# Altium PCB ServoBoard.PcbDoc
Units mil, origin at the board's own origin, x right, y up, seen from the top; angles counter-clockwise.
Board outline 1294.55 x 1041.99 mil, 2 copper layers (Top Layer, Bottom Layer); 32 components, 25 nets, 158 pads, 33 vias.
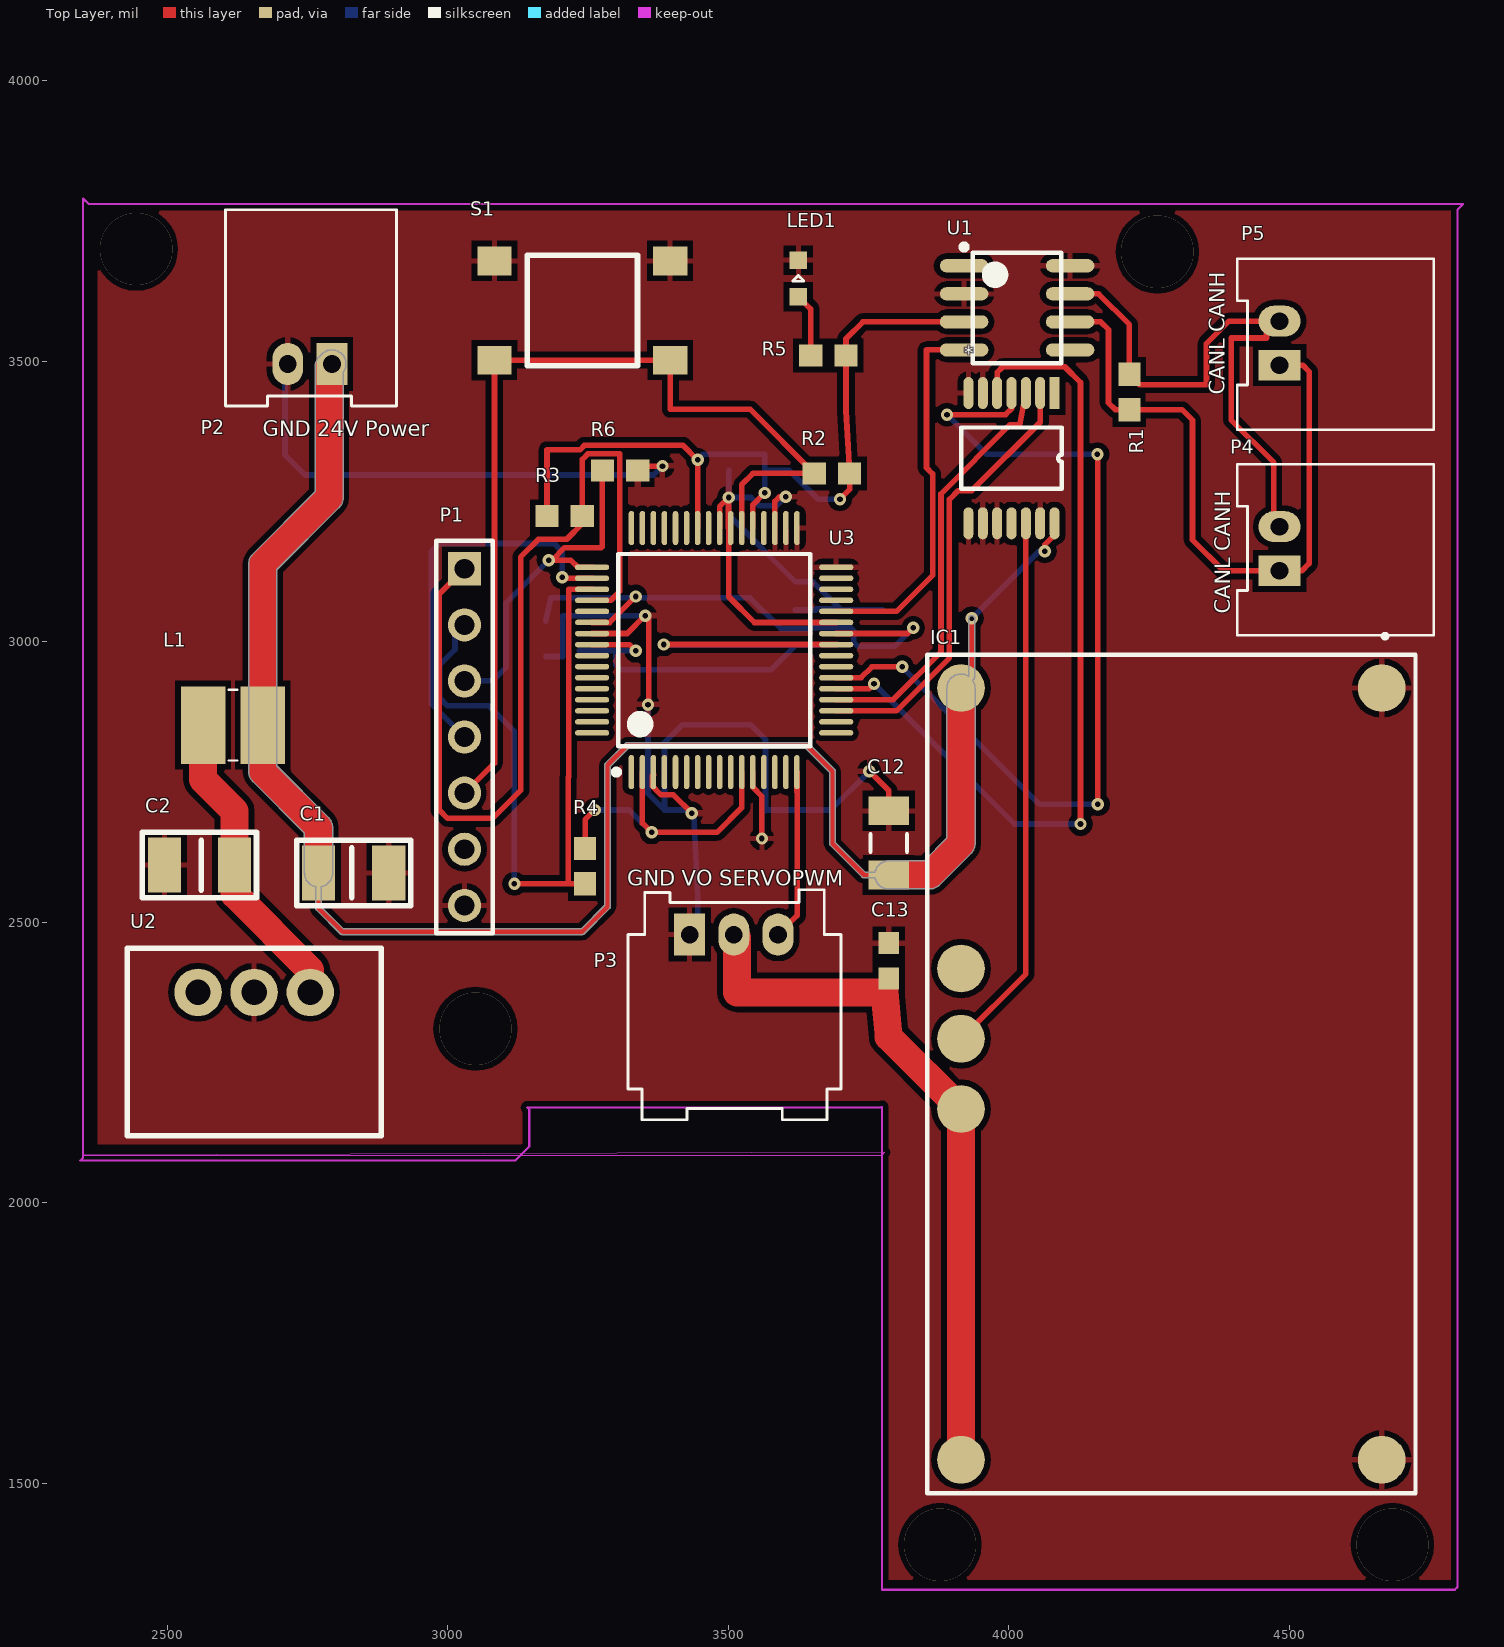
[diagram p0: Top Layer view]
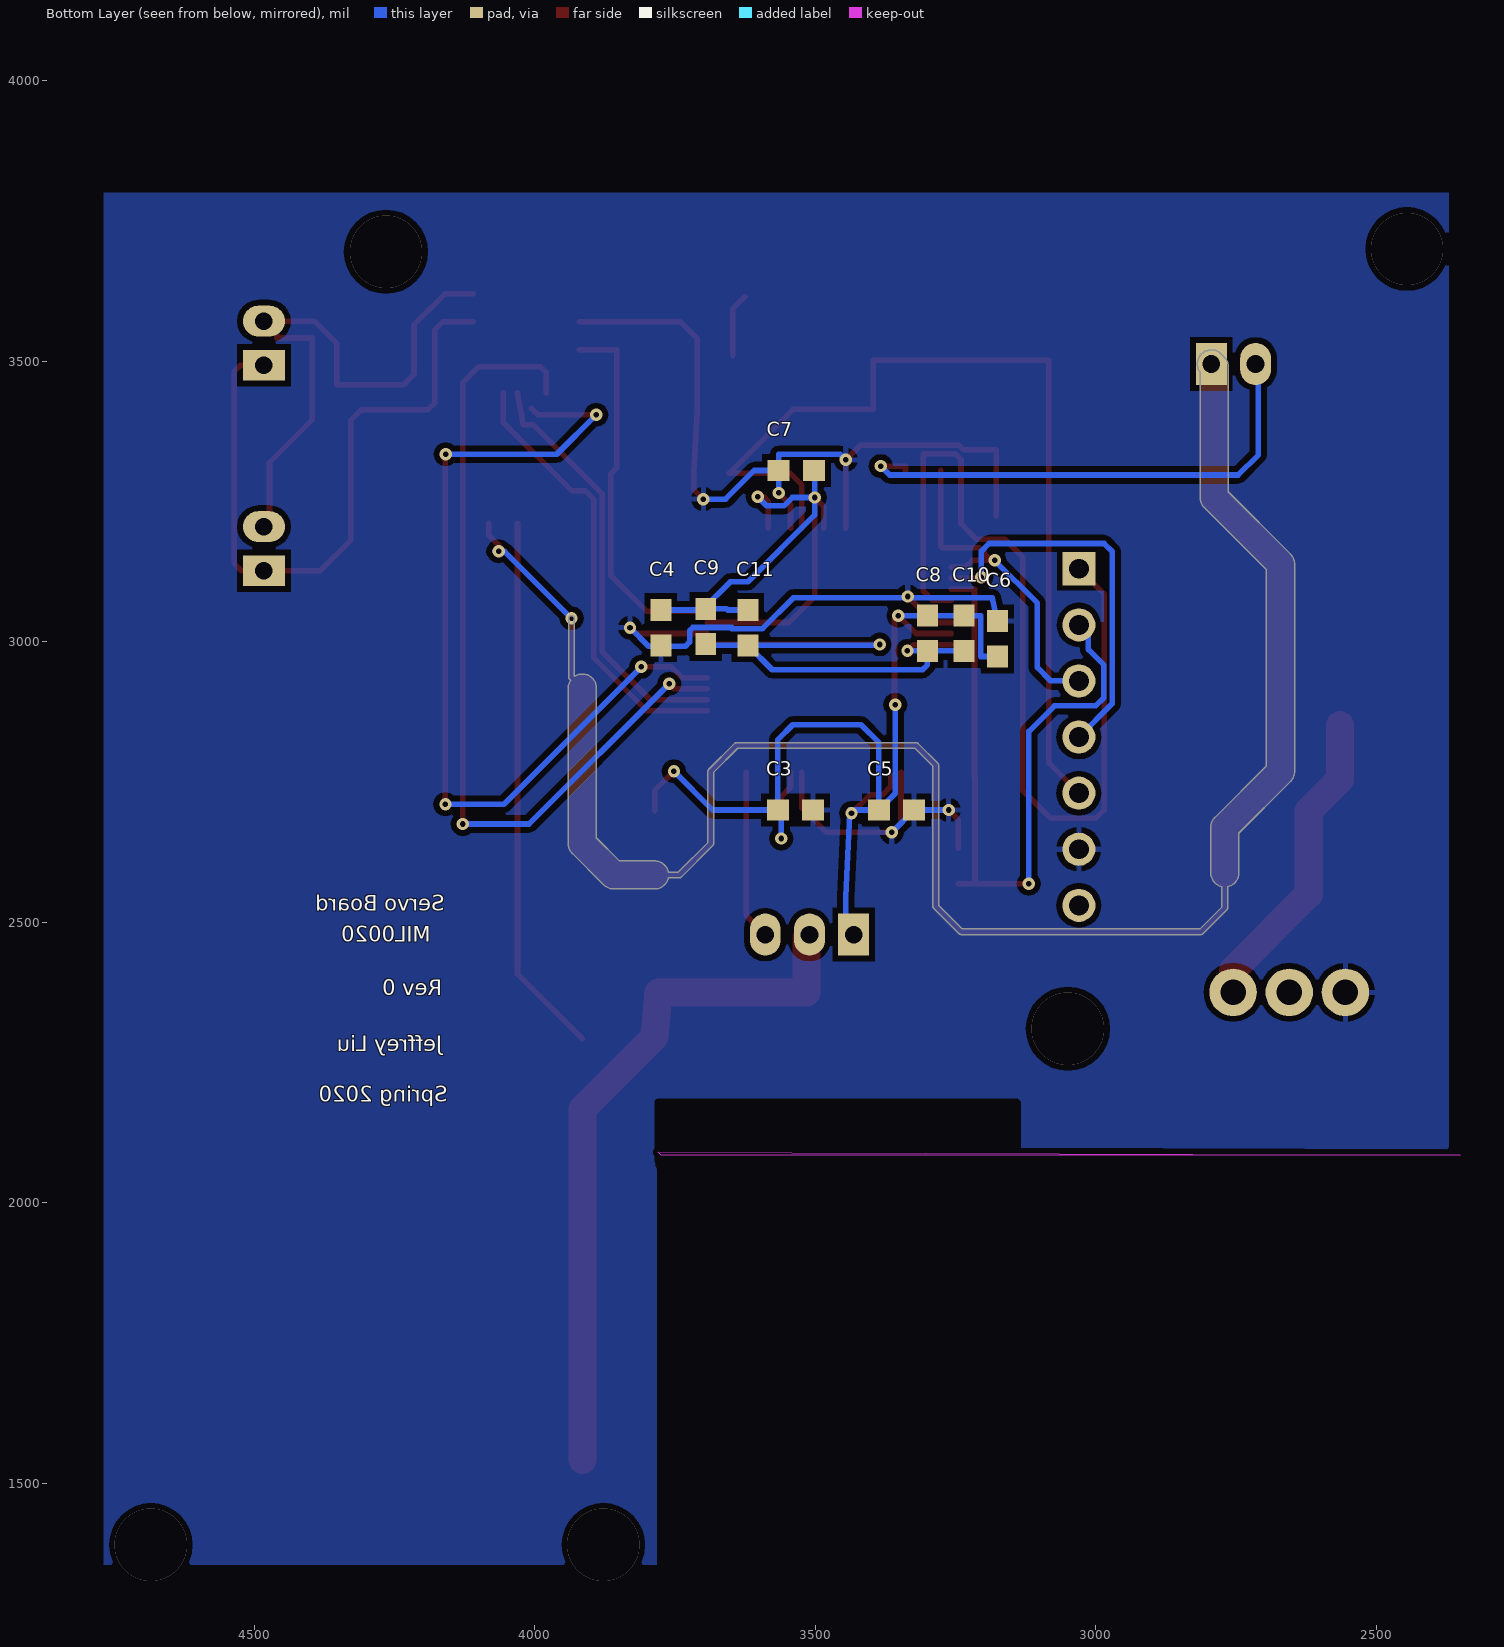
[diagram p1: Bottom Layer view, seen from below]

## Layer stack, top to bottom
Top Solder: solder mask 0.4, Solder Resist, Dk 3.5
Top Layer: signal copper 1.4
Dielectric 1: dielectric 12.6, FR-4, Dk 4.8
Bottom Layer: signal copper 1.4
Bottom Solder: solder mask 0.4, Solder Resist, Dk 3.5

## Board outline
2766.27,2521.63 cw(c2769.8,2525.2) 2764.79,2525.2 2764.79,2563.25 cw(c2769.8,2587.76) 2744.79,2587.76 2744.79,2658.64 2652.8,2750.63 cw(c2670.48,2768.32) 2645.47,2768.32 2645.47,3138.48 cw(c2670.48,3138.48) 2652.8,3156.17 2763.72,3267.1 2763.72,3490 cw(c2788.74,3490) 2771.05,3507.69 2776.05,3512.69 cw(c2793.74,3495) 2818.76,3495 cw(c2793.74,3495) 2813.76,3479.99 2813.76,3256.74 cw(c2788.74,3256.74) 2806.43,3239.05 2695.5,3128.12 2695.5,2778.68 2787.49,2686.69 cw(c2769.8,2669) 2794.82,2669 2794.82,2587.76 cw(c2769.8,2587.76) 2774.82,2563.25 2774.82,2527.27 2814.08,2488.01 3237.92,2488.01 3279.99,2530.08 3279.99,2780 cw(c3285,2780) 3281.47,2783.56 3281.45,2783.55 3316.45,2818.55 3316.44,2818.53 cw(c3320,2815) 3320,2820.01 3640,2820.01 cw(c3640,2815) 3643.56,2818.53 3643.55,2818.55 3689.55,2772.55 3689.53,2772.56 cw(c3686,2769) 3691.01,2769 3691.01,2642.08 3743.89,2589.21 3761.68,2589.21 cw(c3786.19,2584.19) 3786.19,2609.21 3848.83,2609.21 3889.99,2650.36 3889.99,2917.33 cw(c3915,2917.33) 3928.78,2938.21 3929.14,2938.56 3929.14,3041.5 cw(c3934.15,3041.5) 3939.16,3041.5 3939.16,2936.48 cw(c3934.15,2936.48) 3937.68,2932.92 3937.7,2932.94 3935.88,2931.12 cw(c3915,2917.33) 3940.01,2917.33 3940.01,2640 cw(c3915,2640) 3932.69,2622.31 3876.88,2566.5 cw(c3859.19,2584.19) 3859.19,2559.18 3786.19,2559.18 cw(c3786.19,2584.19) 3761.68,2579.18 3741.81,2579.18 cw(c3741.81,2584.19) 3738.24,2580.66 3738.26,2580.65 3682.45,2636.45 3682.47,2636.44 cw(c3686,2640) 3680.99,2640 3680.99,2766.92 3637.92,2809.99 3322.08,2809.99 3290.01,2777.92 3290.01,2528 cw(c3285,2528) 3288.53,2524.44 3288.55,2524.45 3243.55,2479.45 3243.56,2479.47 cw(c3240,2483) 3240,2477.99 2812,2477.99 cw(c2812,2483) 2808.44,2479.47 2808.45,2479.45
cut-out: 2350,2085 3774.23,2085 3779.23,2090

## Design rules (kind name [scope] priority, off if disabled: settings)
Clearance [All] p1: gap=10 ignorepadtopadclearanceinfootprint=FALSE except(0: Arc-Hole Track-Hole SMDPad-Hole THPad-Hole Via-Hole Fill-Hole Poly-Hole Region-Hole Text-Hole; 5: Track-Track Track-SMDPad SMDPad-SMDPad; 7: Track-Via)
HoleSize [All] p1: absolutevalues=TRUE maxlimit=150 minlimit=10 maxpercent=80.000 minpercent=20.000
MinimumAnnularRing [All] p1: minimumring=7
MinimumSolderMaskSliver [All] p1: minsoldermaskwidth=1
PolygonConnect [All] p1: connectstyle=Relief reliefconductorwidth=10 reliefentries=4 polygonreliefangle="90 Angle" airgapwidth=10
RoutingVias [All] p1: holewidth=10 width=22 viastyle="Through Hole" minholewidth=10 minwidth=22 maxholewidth=100 maxwidth=150
SilkToSolderMaskClearance [IsPad] p1: minsilkscreentomaskgap=5 clearancetoexposedcopper=TRUE
SolderMaskExpansion [All] p1: expansion=4
Width [All] p1: maxlimit=150 minlimit=8 preferedwidth=10
27 further rules are at their usual default settings.

## Classes and differential pairs
component class ServoBoard: "24V Gnd Power" * C3 C4 C5 C6 C7 C8 C9 C10 C11 C12 C13 C? IC1 LED1 P1 P2 P3 R2 R3 R4 R5 R6 S1 "Servo PWM Power" U3 U?
component class RECOM_24to3v3: C1 C2 L1 U2
component class CAN_Connections: "CANH/CANL Power" R1 U1

## Components (designator, comment, footprint, x,y, rotation, side; value= is the part's Value field where it differs from the comment)
* "MCP41HV31" "MCP41HV31 - duplicate2" 4081.77,3443.19 r270 top
C1 "CAP1210" CAP1210 2769.02,2587.76 r180 top value=10uF
C2 "CAP1210" CAP1210 2620.98,2601.81 r0 top value=10uF
C3 "Cap" CAPC0603 3535,2700 r0 bottom value=0.1uF
C4 "Cap" CAPC0603 3775,3025 r90 bottom value=0.1uF
C5 "Cap" CAPC0603 3355,2700 r0 bottom value=0.1uF
C6 "Cap" CAPC0603 3175,3005 r270 bottom value=0.1uF
C7 "Cap" CAPC0603 3533.5,3305 r180 bottom value=2.0uF
C8 "Cap" CAPC0603 3300,3015 r90 bottom value=0.1uF
C9 "Cap" CAPC0603 3695,3027.09 r90 bottom value=0.1uF
C10 "Cap" CAPC0603 3235,3015 r90 bottom value=1.0uF
C11 "Cap" CAPC0603 3620,3025 r90 bottom value=2.2uF
C12 "Cap" CAPC1206 3786.19,2641.28 r90 top value=2.2uF
C13 "Cap" CAPC0603 3786.19,2431.04 r90 top value=330uF
IC1 "PTN78020WAH" EUL(R-PDSS-B7) 4290,2229.54 r270 top
L1 "RLS-567" RLS567 2617.34,2851.23 r180 top
LED1 "LED" LED0603 3625,3647.48 r90 top
P1 "Header 7" HDR1X7 3030,3130 r270 top
P2 "2-pin Horz Sherlock" MOLEX-HDR-1X2-SHERLOCK-HORZ 2793.74,3495 r0 top
P3 "3pos RA sherlock connector" MOLEX-HDR-1X3-SHERLOCK-RA 3431.34,2477.79 r180 top
P4 "2-pin Horz Sherlock" MOLEX-HDR-1X2-SHERLOCK-HORZ 4482.54,3126.35 r270 top
P5 "2-pin Horz Sherlock" MOLEX-HDR-1X2-SHERLOCK-HORZ 4482.54,3492.61 r270 top
R1 "Res" RES0603 4215,3445 r90 top value=120
R2 "Res" RES0603 3685,3300 r180 top value=10k
R3 "Res" RES0603 3208.5,3223.74 r0 top value=10k
R4 "Res" RES0603 3245,2600 r270 top value=10k
R5 "Res" RES0603 3678.5,3510 r180 top value=1k
R6 "Res" RES0603 3307.36,3305 r0 top value=10k
S1 "Button" PTS645xxxxSMTR92 3240,3590 r180 top
U1 "SN65HVD230DR" SOIC-8pin 4015,3595 r0 top
U2 "R-78C3.3-1.0" R-78C3.3-1.0 2755,2375 r180 top
U3 "TM4C123GH6PMT7R" TM4C123GH6PMT7R_L 3475,2985 r90 top value=Value

## Footprints (in the part's own frame and the unit in brackets; to place one, negate y for a bottom-side part, rotate by r counter-clockwise, add the part's x,y. Pads: shape width x height; smd on the part's side, far side on the other; paste and mask are expansions set on the pad)
CAP1210 [mm]
  rect 1.5x2.5 smd: 1(-0.02,0) 2(-3.2,0)
  silkscreen extent -4.2,-1.48 0.97,1.48, body extent -3.22,-1.25 0,1.26, height 2.5
CAPC0603 [mm] "Chip Capacitor, 2-Leads, Body 1.60x0.80mm, IPC Medium Density"
  rect 1x0.95 smd: 1(-0.8,0) 2(0.8,0)
  body extent -0.88,-0.48 0.87,0.48, height 0.8
CAPC1206 [mm] "Chip Capacitor, 2-Leads, Body 3.20x1.60mm, IPC Medium Density"
  rect 1.3x1.85 smd: 1(-1.45,0) 2(1.45,0)
  silkscreen extent -0.4,-0.83 0.4,0.83, body extent -1.7,-0.9 1.7,0.9, height 1.8
EUL(R-PDSS-B7) [mm]
  round 2.16 smd: 1(-17.47,9.525) 2(-17.47,-9.525) 3(-4.77,-9.525) 4(-1.59,-9.525) 5(1.59,-9.525) 6(17.47,-9.525) 7(17.47,9.525)
  silkscreen extent -19.91,-11.05 18.99,11.05
HDR1X7 [mm] "Connector; Header; 7 Position"
  rect 1.5x1.5 hole 0.9: 1(0,0)
  round 1.5 hole 0.9: 2(2.54,0) 3(5.08,0) 4(7.62,0) 5(10.16,0) 6(12.7,0) 7(15.24,0)
  silkscreen extent -1.27,-1.27 16.51,1.27
LED0603 [mm] "Chip LED, 2-Leads, Body 1.60x0.80mm, IPC Medium Density"
  rect 0.8x0.8 smd: A(-0.825,0) C(0.825,0)
  silkscreen extent -0.12,-0.25 0.13,0.25, body extent -0.88,-0.48 0.87,0.47, height 0.8
"MCP41HV31 - duplicate2" [mm]
  rect 1.45x0.45 smd: 1(0,0)
  oval 1.45x0.45 smd: 2(0,-0.65) 3(0,-1.3) 4(0,-1.95) 5(0,-2.6) 6(0,-3.25) 7(0,-3.9) 8(5.9,-3.9) 9(5.9,-3.25) 10(5.9,-2.6) 11(5.9,-1.95) 12(5.9,-1.3) 13(5.9,-0.65) 14(5.9,0)
  silkscreen extent 1.56,-4.23 4.34,0.33
MOLEX-HDR-1X2-SHERLOCK-HORZ [mm]
  rect 1.397x1.905 hole 0.8: 1(0,0)
  oval 1.397x1.905 hole 0.8: 2(-2,0)
  silkscreen extent -4.83,-1.91 2.92,6.98, body extent -4.83,-1.91 2.87,8.59, height 5.54
MOLEX-HDR-1X3-SHERLOCK-RA [mm]
  rect 1.397x1.905 hole 0.8: 1(0,0)
  oval 1.397x1.905 hole 0.8: 2(-2,0) 3(-4,0)
  silkscreen extent -6.86,-2.03 2.79,8.38, body extent -6.88,-1.99 2.82,8.51, height 5.75
PTS645xxxxSMTR92 [mm] "PTS645 Series SMT 6 mm Tactile Switch"
  rect 1.555x1.3 smd: A(-3.975,2.25) A(3.975,2.25) B(-3.975,-2.25) B(3.975,-2.25)
  silkscreen extent -2.5,-2.5 2.5,2.5, body extent -3,-3 3,3, height 4.5
R-78C3.3-1.0 [mm] "CONV DC/DC 1A 3.3V OUT SIP VERT"
  round 2.15 hole 1.15: 1(0,0) 2(2.54,0) 3(5.08,0)
  silkscreen extent -3.21,-2 8.29,6.5, body extent -3.3,-2.03 8.38,6.6, height 10.4
RES0603 [mm] "Chip Resistor, 2-Leads, Body 1.60x0.80mm, IPC Medium Density"
  rect 1.05x1 smd: 1(-0.8,0) 2(0.8,0)
  body extent -0.88,-0.48 0.87,0.47, height 0.8
RLS567 [mm]
  rect 2x3.5 smd: 1(-1.35,0) 2(1.35,0)
  silkscreen extent -0.2,-1.6 0.2,1.6, body extent -2.54,-1.9 2.54,1.91, height 2.6
SOIC-8pin [mm] "For 296-1345-1-ND"
  oval 2.2x0.6 smd: 1(-2.4,1.905) 2(-2.4,0.635) 3(-2.4,-0.635) 4(-2.4,-1.905) 5(2.4,-1.905) 6(2.4,-0.635) 7(2.4,0.635) 8(2.4,1.905)
  silkscreen extent -2.52,-2.5 2,2.88, body extent -2,-2.5 2,2.5, height 1.75
TM4C123GH6PMT7R_L [mm]
  oval 1.55x0.25 smd paste-0.102 mask+0.051: 1(-5.525,3.75) 2(-5.525,3.25) 3(-5.525,2.75) 4(-5.525,2.25) 5(-5.525,1.75) 6(-5.525,1.25) 7(-5.525,0.75) 8(-5.525,0.25) 9(-5.525,-0.25) 10(-5.525,-0.75) 11(-5.525,-1.25) 12(-5.525,-1.75) 13(-5.525,-2.25) 14(-5.525,-2.75) 15(-5.525,-3.25) 16(-5.525,-3.75) 33(5.525,-3.75) 34(5.525,-3.25) 35(5.525,-2.75) 36(5.525,-2.25) 37(5.525,-1.75) 38(5.525,-1.25) 39(5.525,-0.75) 40(5.525,-0.25) 41(5.525,0.25) 42(5.525,0.75) 43(5.525,1.25) 44(5.525,1.75) 45(5.525,2.25) 46(5.525,2.75) 47(5.525,3.25) 48(5.525,3.75)
  oval 0.25x1.55 smd paste-0.102 mask+0.051: 17(-3.75,-5.525) 18(-3.25,-5.525) 19(-2.75,-5.525) 20(-2.25,-5.525) 21(-1.75,-5.525) 22(-1.25,-5.525) 23(-0.75,-5.525) 24(-0.25,-5.525) 25(0.25,-5.525) 26(0.75,-5.525) 27(1.25,-5.525) 28(1.75,-5.525) 29(2.25,-5.525) 30(2.75,-5.525) 31(3.25,-5.525) 32(3.75,-5.525) 49(3.75,5.525) 50(3.25,5.525) 51(2.75,5.525) 52(2.25,5.525) 53(1.75,5.525) 54(1.25,5.525) 55(0.75,5.525) 56(0.25,5.525) 57(-0.25,5.525) 58(-0.75,5.525) 59(-1.25,5.525) 60(-1.75,5.525) 61(-2.25,5.525) 62(-2.75,5.525) 63(-3.25,5.525) 64(-3.75,5.525)
  silkscreen extent -5.65,-4.35 4.35,4.55, body extent 0,0 0.25,0.25, height 0.25

## Part data
C1 C2: "CAP CER 10UF 50V 20% X5R 1210", Supplier Part Number 1=CGA6P1X7R1N106K250AC, Supplier 1=Digi-Key
C3 C4 C5 C6 C7 C8 C9 C10 C11 C12 C13: Supplier Part Number 1=1276-1000-1-ND, Supplier 1=Digi-Key
IC1: "Integrated Circuit", Manufacturer_Name="Texas Instruments", Mouser Part Number=595-PTN78020WAH, RS Part Number=5457849P, Datasheet Link=http://www.ti.com/lit/gpn/ptn78020w, Manufacturer_Part_Number=PTN78020WAH, Mouser Price/Stock=https://www.mouser.com/Search/Refine.aspx?Keyword=595-PTN78020WAH, RS Price/Stock=http://uk.rs-online.com/web/p/products/5457849P
L1: "Inductor", Manufacturer_Name="RECOM Power", Mouser Part Number=919-RLS-567, Datasheet Link=https://componentsearchengine.com/Datasheets/1/RLS-567.pdf, Height=3.1mm, Manufacturer_Part_Number=RLS-567, Mouser Price/Stock=https://www.mouser.com/Search/Refine.aspx?Keyword=919-RLS-567
LED1: Color=Green, Supplier Part Number 1=754-1122-1-ND, Supplier 1=Digi-Key
P1: "Header, 7-Pin", LatestRevisionDate=17-Jul-2002, LatestRevisionNote="Re-released for DXP Platform.", Publisher="Altium Limited"
P2 P4 P5: library part MOLEX-HDR-1x2-SHERLOCK_RA, "Header, Molex, 2mm Pitch Sherlock Header, Single Row, Horizontal, 2 Circuits, Length 3.3mm,  0353630260", Manufacturer="Molex Inc", Manufacturer Part Number=0353630260, Supplier Part Number 1=WM18931-ND, Supplier 1=Digi-Key
P3: library part MOLEX-HDR-1x3-SHERLOCK_RA, "Header, Molex, 2mm Pitch Sherlock Header, Single Row, Right Angle 3 Circuits, Length 3.3mm", Manufacturer="Molex Connector Corporation", Manufacturer Part Number=35363-0360, Supplier Part Number 1=WM18932-ND, Supplier 1=Digi-Key
R1 R2 R3 R4 R5 R6: Supplier Part Number 1=RMCF0603JT10K0CT-ND, Supplier 1=Digi-Key
S1: "SPST Button", Supplier Part Number 1=CKN9087CT-ND, Supplier 1=Digi-Key
U1: "IC TXRX CAN 1MBPS 3.3V 8SOIC", Supplier Part Numbe 1=296-11654-1-ND, Supplier 1=Digi-Key
U2: "CONV DC/DC 1A 3.3V OUT SIP VERT", Supplier Part Number 1=945-1394-5-ND, Supplier 1=Digi-Key
U3: "Imported", Alternate_PartNumber=TM4C123GH6PMT, Manufacturer="Texas Instruments", PartNumber=TM4C123GH6PMTR, CompType=IC, MountType=SMT, PackageReference=PM0064A, PIN_COUNT=64, RefDes=RefDes, RoHS=Y, TYPE=TYPE

## Via types
v1: diameter 22, hole 10, Top Layer to Bottom Layer, tented both sides, 28 vias
v2: diameter 129, hole 129, Top Layer to Bottom Layer, tented both sides, 5 vias

## Nets (pads, with @x,y where several pads share a name; then routed paths per layer and width w, separated by ;. In a path a pad name is that pad's centre, name@x,y a point inside that pad or via, vN(x,y) a via of type N, cw(c..) or ccw(c..) an arc to the next point about the centre after c; other vN are vias at no path point)
5V5: *.1
24V: *.14 C1.1 C12.1 IC1.2 L1.1 P2.1 | length 3356.8
  Top Layer w10: C1.1 2769.8,2525.2 2812,2483 3240,2483 3285,2528 3285,2780 3320,2815 3640,2815 3686,2769 3686,2640 3741.81,2584.19 C12.1 ; IC1.2 3934.15,2936.48 v1(3934.15,3041.5) ; v1(4064.15,3161.29) 4064.15,3172.53 4081.77,3190.15 *.14
  Top Layer w50: C1.1 2769.8,2669 2670.48,2768.32 L1.1 2670.48,3138.48 2788.74,3256.74 2788.74,3490 P2.1 ; C12.1 3859.19,2584.19 3915,2640 IC1.2
  Bottom Layer w10: v1(3934.15,3041.5) 4053.65,3161 v1@4071,3161
CAN0_RX: U1.4 U3.28 | length 671.7
  Top Layer w10: U3.28 3800,3053.9 3864.37,3118.27 3864.37,3299.15 3853.55,3309.96 3853.55,3520 U1.4
CAN0_TX: U3.31
CAN_TX: U1.1
CANH: P4.2 P5.2 R1.2 U1.7 | length 1062.4
  Top Layer w10: U1.7 4160,3620 4215,3565 R1.2 4233.65,3457.85 4352.54,3457.85 4352.54,3531.35 4392.54,3571.35 P5.2 4459.5,3548.31 4459.5,3541.35 4396.54,3541.35 4396.54,3395.35 4472.54,3319.35 4472.54,3205.09 P4.2
CANL: P4.1 P5.1 R1.1 U1.6 | length 1216.4
  Top Layer w10: U1.6 4164,3570 4177.8,3556.2 4177.8,3425.71 4190,3413.5 R1.1 4308.89,3413.5 4327.54,3394.86 4327.54,3181.35 4382.54,3126.35 P4.1 4522.54,3126.35 4535.54,3139.35 4535.54,3481.35 4524.28,3492.61 P5.1
GND: *.6 *.7 *.8 *.9 *.10 *.13 C1.2 C2.2 C3.2 C4.2 C5.2 C6.2 C7.2 C8.2 C9.2 C10.2 C11.2 C12.2 C13.2 IC1.1 IC1.7 LED1.C P1.7 P2.2 P3.1 R6.2 S1.B U1.2 U1.8 U2.2 U3.3 U3.12 U3.27 U3.32 U3.33 U3.34 U3.35 U3.39 U3.40 U3.55 | length 4080.6
  Top Layer w10: U3.55 3320.03,3014.53 v1(3352,3046.5) 3358.5,3039.99 3358.5,2889.17 v1(3357.12,2887.79) ; R6.2 3338.86,3313 v1(3383,3313) ; U3.3@3366.88,2762.86 3365,2760.98 3365,2742.21 3380.24,2726.97 3402.39,2726.97 v1(3435.21,2694.15) ; U3.40 3484.84,3240.84 v1@3500.53,3256.53 ; U3.39@3500.53,3202.52 v1@3500.53,3256.53 ; v1@3500.53,3260.47 v1@3500.53,3256.53 ; U3.39@3501,3202.52 3501,3080 3546.79,3034.21 U3.27 ; v1(3501,3257) v1@3500.53,3256.53 ; U3.12 3543.9,2740.47 3560.15,2724.22 v1(3560.15,2649.15) ; U3.35 3583.27,3250.03 3591.57,3258.34 v1(3602.45,3258.34) ; v1(3751.69,2769.02) 3786.19,2734.52 C12.2
  Bottom Layer w10: P2.2 2710,3490 2710,3333 2746,3297 3367,3297 v1(3383,3313) ; C6.2 3205,2973.5 3205,3046.5 C10.2 C8.2 v1(3352,3046.5) ; v1(3357.12,2887.79) 3357.12,2729.37 C5.2 ; P3.1 3445.47,2491.92 3445.47,2545 3438.28,2694.29 3438,2700 C5.2 ; 3501,3269 3501,3305 C7.2 ; v1(3560.15,2649.15) 3560.15,2693.65 C3.2 ; v1(3602.45,3258.34) 3586.22,3242.1 3555.47,3242.1 3540.58,3257 v1(3501,3257) 3501,3225.68 3620.06,3106.62 3651.38,3106.62 C9.2@3701.5,3056.5 ; C11.2 3656,3056.5 3658.09,3058.58 C9.2 C9.2@3701.5,3056.5 ; v1(3751.69,2769.02) 3682.67,2700 C3.2 ; C4.2 C9.2@3701.5,3056.5 ; C5.2 3386.5,2820.16 3418.33,2852 3540,2852 3566.5,2825.5 C3.2
Inhibit: IC1.3
Net*_12: *.12 IC1.4 | length 966.7
  Top Layer w10: IC1.4 4030.59,2407.73 *.12
NetC2_1: C2.1 L1.2 U2.1 | length 555.3
  Top Layer w50: L1.2 2564.19,2754.01 2620.2,2698 C2.1 2620.2,2549.8 2755,2415 U2.1
NetLED1_A: LED1.A R5.2 | length 114.1
  Top Layer w10: LED1.A 3647.01,3592.99 R5.2
RST_N: P1.5 R2.2 S1.A U3.38 | length 1713.3
  Top Layer w10: P1.5 3083.5,2783.5 3083.5,3501.42 3396.5,3501.42 3396.5,3414 3539.5,3414 R2.2 3544.21,3300 3524.21,3280 U3.38
ServoPWM: P3.3 U3.16 | length 338.6
  Top Layer w10: P3.3 3622.87,2511.84 U3.16@3622.87,2767.48 ; 3622.64,2732.69 U3.16
SPIChipSelect: *.3 U3.20 | length 753
  Top Layer w10: U3.20 3794,2896.42 3879.37,2981.79 3879.37,3263.52 4002.65,3386.8 4020,3386.8 *.3
SPICLK: *.2 U3.19 | length 794.2
  Top Layer w10: U3.19 3800,2876.73 3894.37,2971.1 3894.37,3253.52 3910,3269.15 3934.15,3269.15 4056.18,3391.18 *.2
SPIRx: *.5 U3.21 | length 1530.9
  Top Layer w10: U3.21 3751.1,2916.1 v1(3760,2925) ; *.5 3979.41,3480 3989.41,3490 4100,3490 4128,3462 v1(4128,2675)
  Bottom Layer w10: v1(3760,2925) 4010,2675 v1(4128,2675)
SPITx: *.4 U3.22 | length 1616.8
  Top Layer w10: U3.22 3737,2935.79 3756.21,2955 v1(3810,2955) ; v1(3890,3404.65) 3994.46,3404.65 *.4@4005.51,3415.7 ; v1(4159,2710) v1@4159,3333.42
  Bottom Layer w10: v1(3810,2955) 4055,2710 v1(4159,2710) ; v1(3890,3404.65) 3960.51,3334.15 v1(4158.15,3334.15)
TCK/SWCLK: P1.1 R3.2 U3.52 | length 1658.3
  Top Layer w10: P1.1 2985,3085 2985,2700 3000,2685 3080,2685 3130,2735 3130,3151 3161.63,3182.63 3212.34,3182.63 3240,3210.29 R3.2 3240,3325 3250,3335 3307,3335 3307,3090 3290.58,3073.58 U3.52
TDI: P1.4 U3.50 | length 700.8
  Top Layer w10: v1(3204,3115) 3206.05,3112.95 U3.50
  Bottom Layer w10: P1.4 2970.47,2889.53 2970.47,3160.47 2985,3175 3190,3175 3204,3161 v1(3204,3115)
TDO/SWO: P1.3 R6.1 U3.49 | length 624.9
  Top Layer w10: v1(3180,3145) v1@3185.65,3145 ; U3.49 3232,3132.64 3219.64,3145 v1@3185.65,3145 ; R6.1 3275.87,3169.53 3273.97,3167.63 3208.28,3167.63 v1@3185.65,3145
  Bottom Layer w10: P1.3 3080,2930 3104,2954 3104,3069 v1(3180,3145)
TMS/SWDIO: P1.2 R4.2 U3.51 | length 1280.9
  Top Layer w10: v1(3119,2568.5) 3215,2568.5 ; R4.2 3215,2568.5 ; U3.51 3216,3093.27 3216,2759 3215,2758 3215,2568.5
  Bottom Layer w10: P1.2 3013,3030 3013,2986 2985.47,2958.47 2985.47,2900 3000,2885.47 3073.53,2885.47 3119,2840 v1(3119,2568.5)
VDD: C3.1 C4.1 C5.1 C6.1 C7.1 P1.6 R2.1 R3.1 R4.1 R5.1 U1.3 U2.3 U3.2 U3.11 U3.26 U3.37 U3.42 U3.54 | length 2997.1
  Top Layer w10: R3.1 3177.01,3341.84 3235.63,3341.84 3243.79,3350 3419.47,3350 v1(3445.47,3324) U3.42 ; R4.1 3245,2683 v1(3262,2700) ; U3.54 3288.67,3034.21 v1(3335,3080.55) ; U3.2 3347.05,2676.46 v1(3363.5,2660) 3480,2660 3524.21,2704.21 U3.11 ; U3.37 3543.9,3244 v1(3565,3265.1) ; U3.26 3819.53,3014.53 v1(3830,3025) ; v1(3699.29,3254.15) 3716.5,3271.35 R2.1 3710,3411.5 R5.1 3710,3540 3740,3570 U1.3
  Bottom Layer w10: C6.1 3184,3078 3539,3078 3593.81,3023.19 3648.7,3023.19 ; v1(3262,2700) C5.1 v1(3363.5,2660) ; v1(3445.47,3324) 3455.47,3334 3565,3334 C7.1 ; v1(3565,3265.1) C7.1 ; 3648.7,3025.28 3717.84,3025.28 3723.7,3019.42 3723.7,2999.35 3731.56,2991.49 3796.49,2991.49 v1(3830,3025) ; v1(3699.29,3254.15) 3659.71,3254.15 3608.86,3305 C7.1
VDDC: C8.1 C9.1 C10.1 C11.1 U3.25 U3.56 | length 1177.6
  Top Layer w10: U3.56 3324.17,2994.84 v1(3335.5,2983.5) ; v1(3385,2995) 3692.36,2995 U3.25
  Bottom Layer w10: C10.1 C8.1 ; v1(3335.5,2983.5) C8.1 ; v1(3385,2995) 3382.1,2995 3380.61,2993.5 C11.1 ; C9.1 3692.91,2993.5 C11.1 ; C8.1 3300,2958.5 3308.5,2950 3576.5,2950 C11.1
VO: C13.1 IC1.5 IC1.6 P3.2 | length 1255.3
  Top Layer w50: P3.2 3515.63,2472.24 3515.63,2375 3778.94,2375 3786.19,2295.75 IC1.5 IC1.6
pads on no net: *.11 U1.5 U3.1 U3.4 U3.5 U3.6 U3.7 U3.8 U3.9 U3.10 U3.13 U3.14 U3.15 U3.17 U3.18 U3.23 U3.24 U3.29 U3.30 U3.36 U3.41 U3.43 U3.44 U3.45 U3.46 U3.47 U3.48 U3.53 U3.57 U3.58 U3.59 U3.60 U3.61 U3.62 U3.63 U3.64
copper on no net:
  other v2: 3877.54,1390 4684.03,1390 3049.5,2310 4265,3695 2445,3700

## Polygon pours and split planes (outlines as drawn)
VDD on Bottom Layer "Bottom Layer-VDD 1" (solid, pour order 39): 2370.97,2075.97 3132.81,2075.97 3132.81,2180 3138.78,2185.97 3780.24,2185.97 3784.47,2184.22 3784.8,2183.89 3786.55,2179.67 3786.55,2074.22 3784.55,2069.77 3785.97,2066.36 3782.33,2060.86 3782.33,1355 4768.06,1355 4768.06,3800 2370.97,3800
VDD on Bottom Layer "Bottom Layer-VDD 1" (solid, pour order 38): 2370.97,2075.97 3132.81,2075.97 3132.81,2180 3138.78,2185.97 3780.24,2185.97 3784.47,2184.22 3784.8,2183.89 3786.55,2179.67 3786.55,2074.22 3784.55,2069.77 3785.97,2066.36 3782.33,2060.86 3782.33,1355 4768.06,1355 4768.06,3800 2370.97,3800
no net on Bottom Layer "Bottom Layer-No Net" (solid, pour order 41): 6155,3495
no net on Bottom Layer "Bottom Layer-No Net 1" (solid, pour order 40): 5910,3555
VDD on Bottom Layer "Bottom Layer-VDD" (solid, pour order 36): 2195,4555
GND on Top Layer "Top Layer-GND" (solid, pour order 37): 2375.97,3771.81 2375.97,2103.74 3139.03,2103.74 3139.03,2169.62 3140.78,2173.84 3777.63,2173.84 3779.22,2172.25 3780.97,2168.03 3780.97,1327.77 4794.03,1327.77 4794.03,3771.81
no net on Top Layer "Top Layer-No Net" (solid, pour order 44): 4477.18,2800
no net on Top Layer "Top Layer-No Net 1" (solid, pour order 43): 4278.56,2885
no net on Top Layer "Top Layer-No Net 2" (solid, pour order 42): 4309.19,2955.47

## Keep-outs
Top Layer:
  lines w3.94: 3774.23,1320 3774.23,2170.44 3773.41,2169.62 3142.02,2169.62 3145.29,2166.34 3145.29,2100.29 3120,2075 2345,2075 2350,2080 2350,3790 2360,3780 4810,3780 4800,3770 4800,1315 4795,1310 3774.23,1310 3774.23,1330

## Other copper
Top Layer:
  pour cut-out: 2405,4040

## Silkscreen, mask and mechanical layers (free items; w line width, h text height)
Top Overlay:
  text "CANL CANH" at 4385,3440 h27.56 r90
  text "GND 24V Power" at 2670,3366 h27.56
  text "CANL CANH" at 4395,3050 h27.56 r90
  text "GND VO SERVOPWM" at 3320,2565 h27.56
Bottom Overlay:
  text "Servo Board" at 4160,2520 h27.56
  text "MIL0020" at 4185,2465 h27.56
  text "Rev 0" at 4165,2370 h27.56
  text "Jeffrey Liu" at 4165,2270 h27.56
  text "Spring 2020" at 4155,2180 h27.56